# Altium PCB PCB1.PcbDoc
Units mil, origin at the board's own origin, x right, y up, seen from the top; angles counter-clockwise.
Board outline 4500 x 2600 mil, 2 copper layers (Top Layer, Bottom Layer), stack 60.4 mil thick; 9 components, 8 nets, 82 pads, 0 vias.
Unrouted connection lines stored in the file: 6.
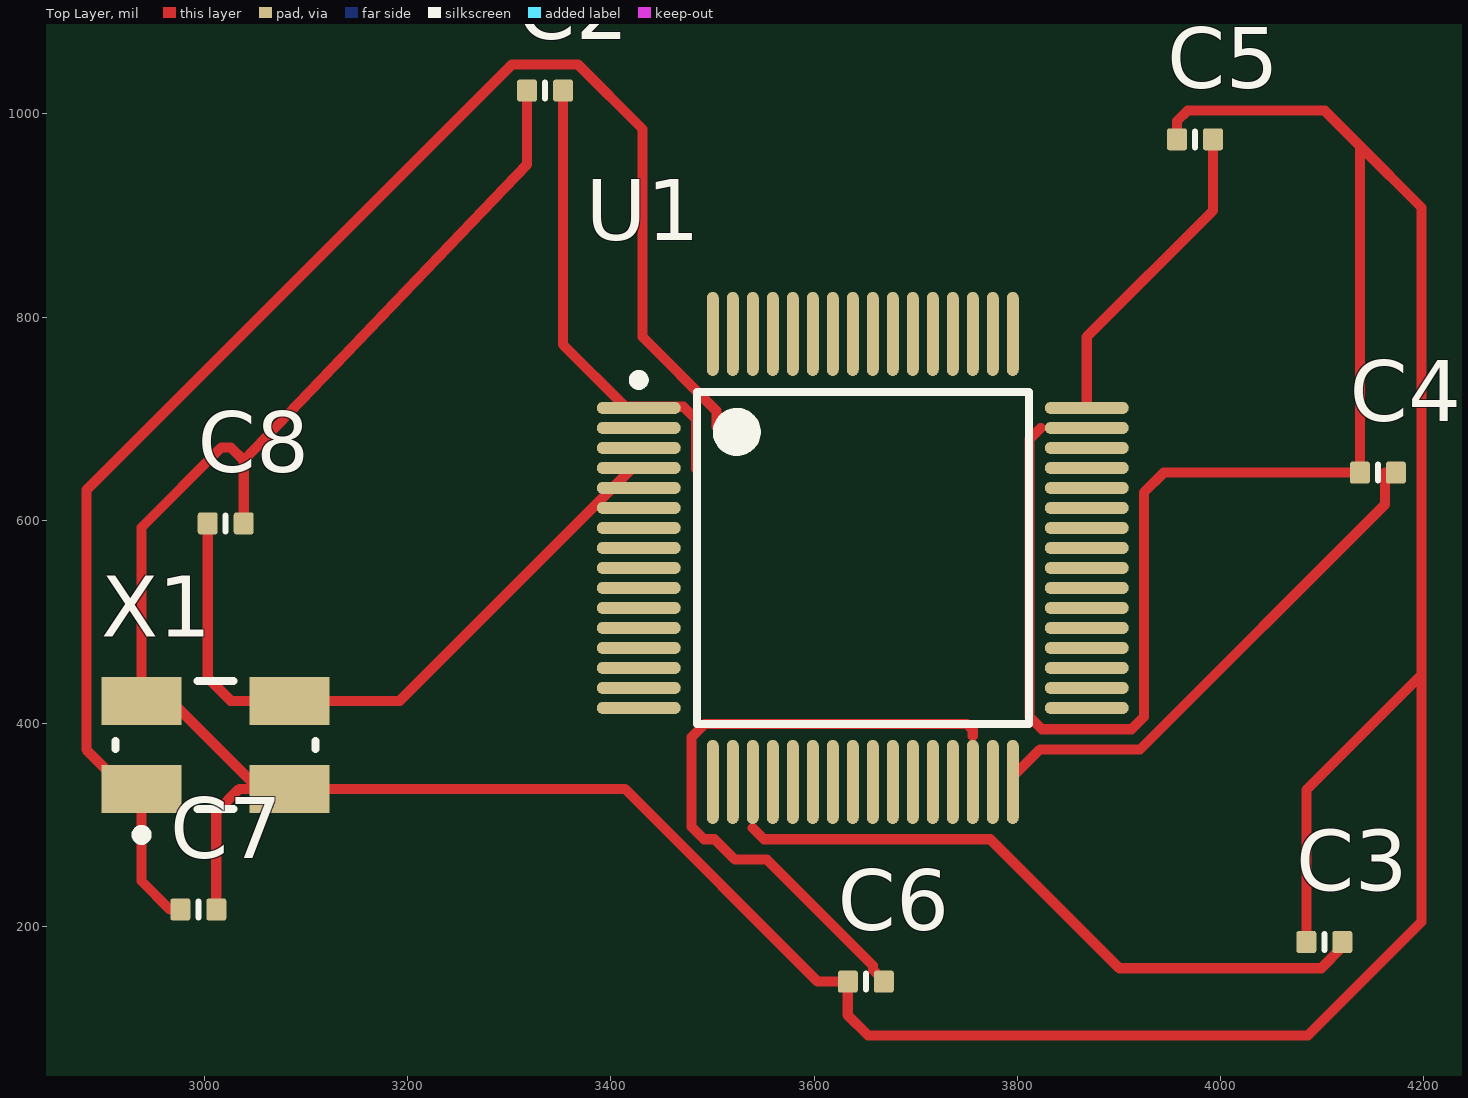
[diagram p0: Top Layer view]
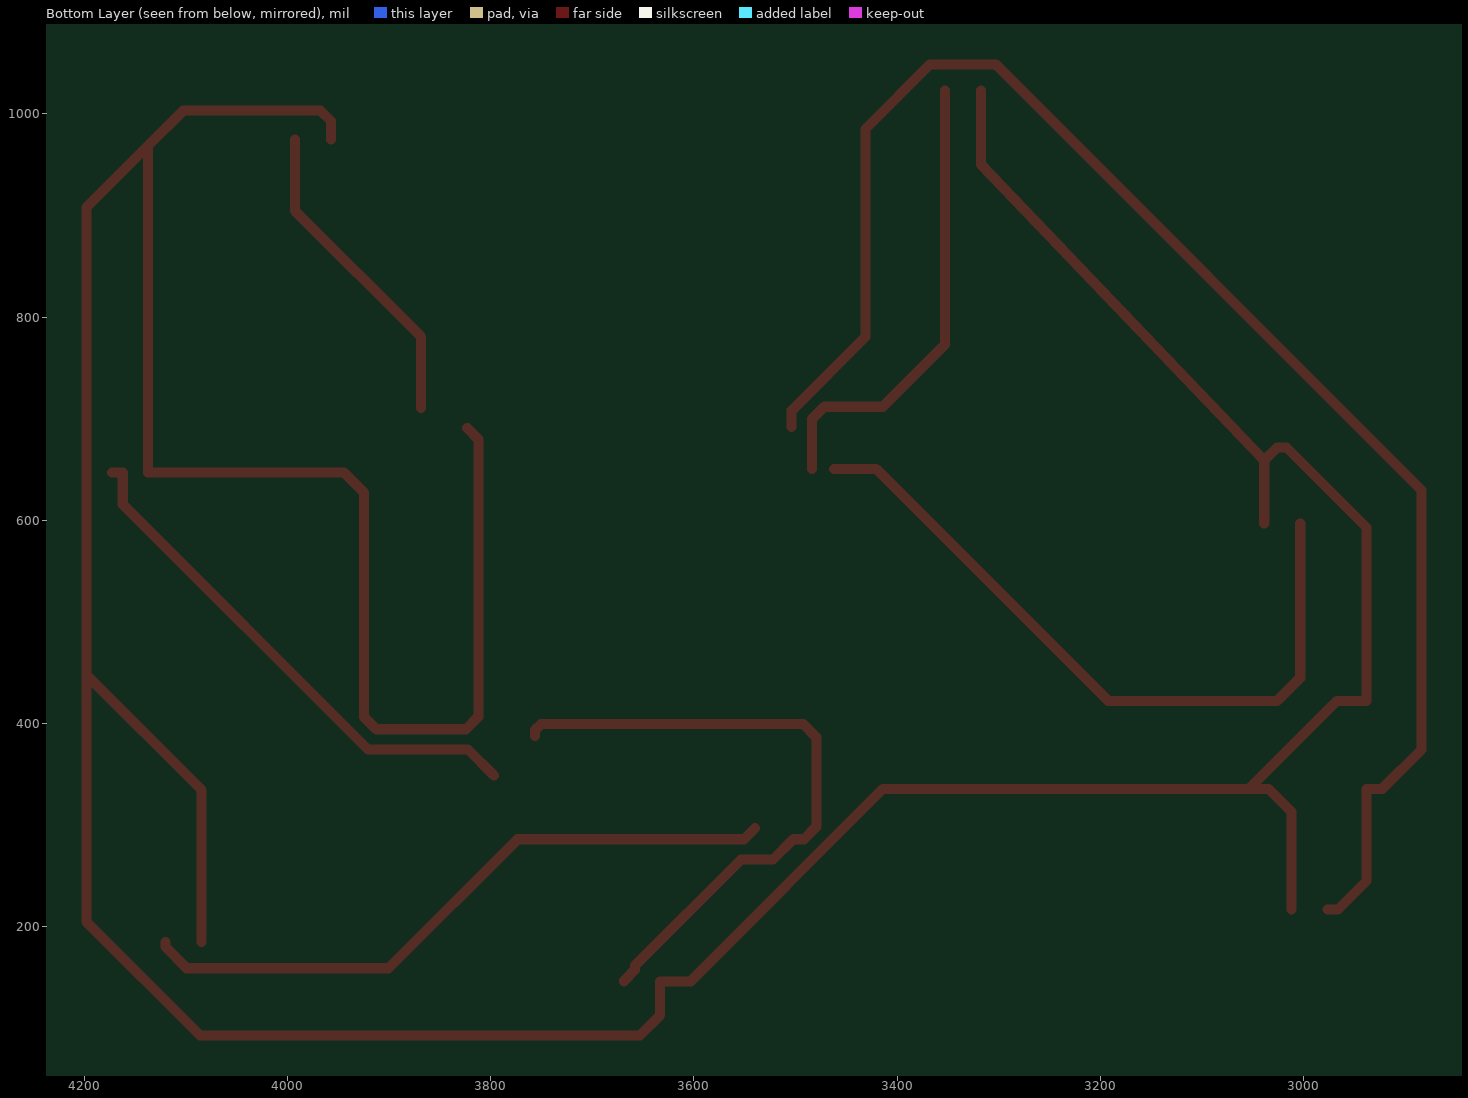
[diagram p1: Bottom Layer view, seen from below]
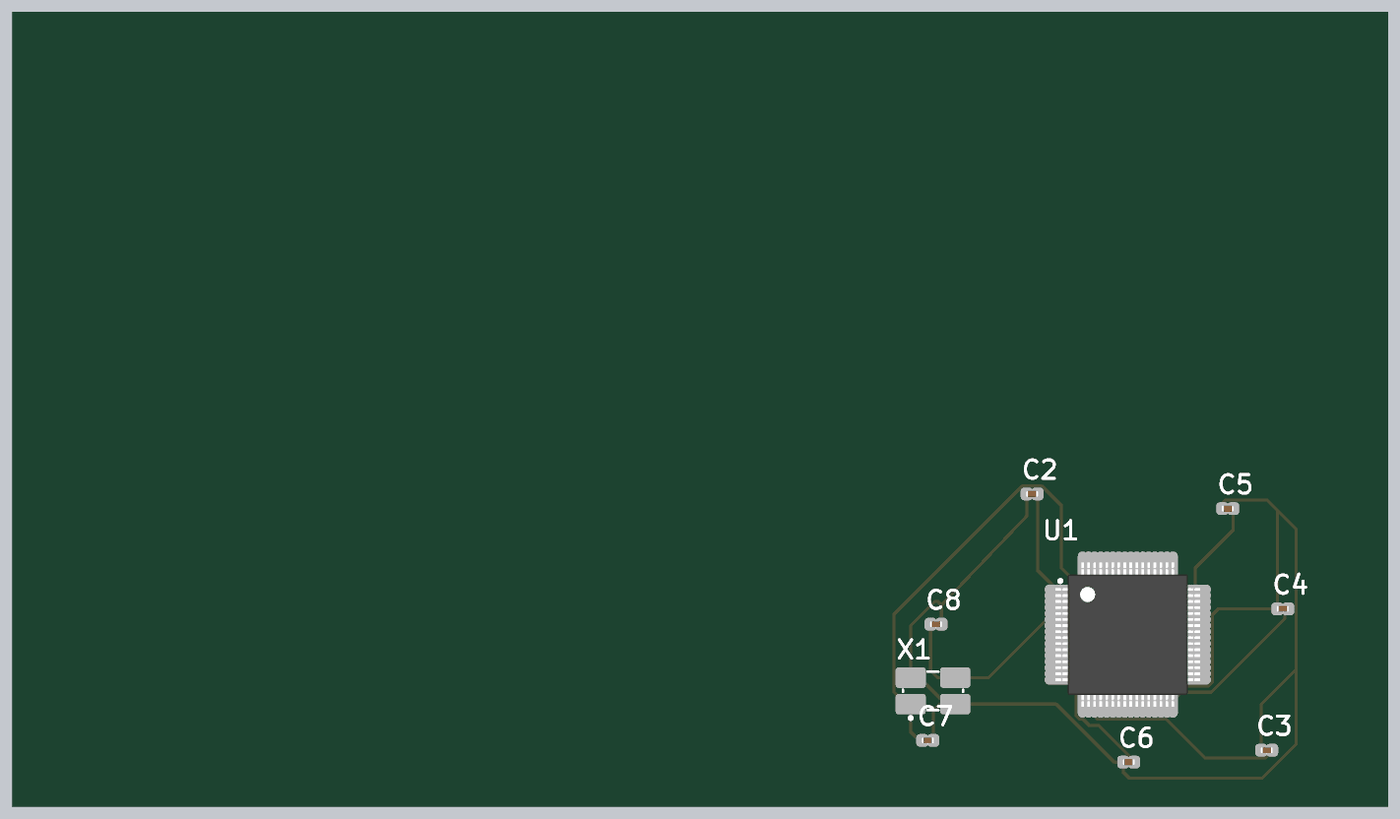
[diagram p2: 3D render of the assembled board from above, using the file's embedded part models]

## Layer stack, top to bottom
Top Solder: solder mask 0.5, Solder Resist, Dk 3.3
Top Layer: signal copper 0.7
Dielectric1: core 59, FR-4, Dk 4.3
Bottom Layer: signal copper 0.7
Bottom Solder: solder mask 0.5, Solder Resist, Dk 3.3

## Board outline
0,0 4500,0 4500,2600 0,2600

## Design rules (kind name [scope] priority, off if disabled: settings)
Clearance [All] p1 off: gap=10 ignorepadtopadclearanceinfootprint=TRUE
DiffPairsRouting [All] p1: maxlimit=10 minlimit=10 mostfreqgap=10 toplayer_minwidth=10 toplayer_maxwidth=10 toplayer_prefwidth=10 bottomlayer_minwidth=10 bottomlayer_maxwidth=10 bottomlayer_prefwidth=10 maxuncoupledlength=500
HoleSize [All] p1: absolutevalues=TRUE maxlimit=300 minlimit=10 maxpercent=80.000 minpercent=20.000
MinimumAnnularRing [All] p1: minimumring=10
PasteMaskExpansion [All] p1: expansion=10
PlaneClearance [All] p1: clearance=15
PlaneConnect [All] p1: pad.planeconnectstyle=Relief pad.reliefexpansion=20 pad.reliefentries=4 pad.reliefconductorwidth=10 pad.reliefairgap=10 via.planeconnectstyle=Direct via.reliefexpansion=20 via.reliefentries=4 via.reliefconductorwidth=10 via.reliefairgap=10
PolygonConnect [All] p1: thpad.connectstyle=Relief thpad.reliefconductorwidth=10 thpad.reliefentries=4 thpad.polygonreliefangle="90 Angle" thpad.airgapwidth=10 smdpad.connectstyle=Relief smdpad.reliefconductorwidth=10 smdpad.reliefentries=4 smdpad.polygonreliefangle="90 Angle" smdpad.airgapwidth=10 via.connectstyle=Direct via.reliefconductorwidth=10 via.reliefentries=4 via.polygonreliefangle="90 Angle" via.airgapwidth=10
RoomDefinition Sheet1 [InComponentClass('Sheet1')] p1: confinementstyle=ConfineIn formatcopy=TRUE lockcomponents=FALSE outline 1681,36 4473,36 4473,1238 1681,1238
RoutingVias [All] p1: holewidth=10 width=20 viastyle="Through Hole" minholewidth=10 minwidth=20 maxholewidth=10 maxwidth=20
SMDNeckDown [All] p1: percent=100.000
SilkToSolderMaskClearance SilkscreenOverComponentPads [IsPad] p1: minsilkscreentomaskgap=10 clearancetoexposedcopper=TRUE
SolderMaskExpansion [All] p1: expansion=10 istentingtop=FALSE
SupplyNets "Schematic Supply Nets" [InNet('GND')] p1: voltage=0.000
Width [All] p1: maxlimit=10 minlimit=10 preferedwidth=10
24 further rules are at their usual default settings.

## Components (designator, comment, footprint, x,y, rotation, side; value= is the part's Value field where it differs from the comment)
C2 "Capacitor 100nF +/-20% 50V 0402" CAPC0402(1005)60_L 3335.28,1023 r0 top value=100nF
C3 "Capacitor 100nF +/-20% 50V 0402" CAPC0402(1005)60_L 4102.28,185 r0 top value=100nF
C4 "Capacitor 100nF +/-20% 50V 0402" CAPC0402(1005)60_L 4155,647 r0 top
C5 "Capacitor 100nF +/-20% 50V 0402" CAPC0402(1005)60_L 3975,975 r0 top value=100nF
C6 "Capacitor 100nF +/-20% 50V 0402" CAPC0402(1005)60_L 3651,146 r0 top value=100nF
C7 "Capacitor 100nF +/-20% 50V 0402" CAPC0402(1005)60_L 2994,217 r0 top value=20pF
C8 "Capacitor 100nF +/-20% 50V 0402" CAPC0402(1005)60_L 3021,597 r0 top value=20pF
U1 "STM32F401RBT6" STM-LQFP64_M 3648,563 r0 top
X1 "7B-8.000MAAJ-T" TXC-7B-4_V 3011,379 r0 top

## Footprints (in the part's own frame and the unit in brackets; to place one, negate y for a bottom-side part, rotate by r counter-clockwise, add the part's x,y. Pads: shape width x height; smd on the part's side, far side on the other; paste and mask are expansions set on the pad)
CAPC0402(1005)60_L [mm] "Chip Capacitor, Body 1.0x0.5mm, Height 0.6mm, IPC High Density"
  rrect25% 0.5x0.55 smd: 1(-0.45,0) 2(0.45,0)
  silkscreen extent 0,-0.2 0,0.2, body extent -0.5,-0.25 0.5,0.25, height 0.6
STM-LQFP64_M [mm] "Thin QFP, 64-Leads, Body 10x10mm, Pitch 0.5mm, IPC Low Density"
  oval 2.1x0.3 smd: 1(-5.6,3.75) 2(-5.6,3.25) 3(-5.6,2.75) 4(-5.6,2.25) 5(-5.6,1.75) 6(-5.6,1.25) 7(-5.6,0.75) 8(-5.6,0.25) 9(-5.6,-0.25) 10(-5.6,-0.75) 11(-5.6,-1.25) 12(-5.6,-1.75) 13(-5.6,-2.25) 14(-5.6,-2.75) 15(-5.6,-3.25) 16(-5.6,-3.75) 33(5.6,-3.75) 34(5.6,-3.25) 35(5.6,-2.75) 36(5.6,-2.25) 37(5.6,-1.75) 38(5.6,-1.25) 39(5.6,-0.75) 40(5.6,-0.25) 41(5.6,0.25) 42(5.6,0.75) 43(5.6,1.25) 44(5.6,1.75) 45(5.6,2.25) 46(5.6,2.75) 47(5.6,3.25) 48(5.6,3.75)
  oval 0.3x2.1 smd: 17(-3.75,-5.6) 18(-3.25,-5.6) 19(-2.75,-5.6) 20(-2.25,-5.6) 21(-1.75,-5.6) 22(-1.25,-5.6) 23(-0.75,-5.6) 24(-0.25,-5.6) 25(0.25,-5.6) 26(0.75,-5.6) 27(1.25,-5.6) 28(1.75,-5.6) 29(2.25,-5.6) 30(2.75,-5.6) 31(3.25,-5.6) 32(3.75,-5.6) 49(3.75,5.6) 50(3.25,5.6) 51(2.75,5.6) 52(2.25,5.6) 53(1.75,5.6) 54(1.25,5.6) 55(0.75,5.6) 56(0.25,5.6) 57(-0.25,5.6) 58(-0.75,5.6) 59(-1.25,5.6) 60(-1.75,5.6) 61(-2.25,5.6) 62(-2.75,5.6) 63(-3.25,5.6) 64(-3.75,5.6)
  silkscreen extent -5.72,-4.15 4.15,4.57, body extent -6,-6 6,6, height 1.6
TXC-7B-4_V [mm] "SMD, 4-Leads, Body 5x3.2mm, Pitch 3.7mm"
  rect 2x1.2 smd: 1(-1.85,-1.1) 2(1.85,-1.1) 3(1.85,1.1) 4(-1.85,1.1)
  silkscreen extent -2.5,-2.37 2.5,1.6, body extent -2.5,-1.6 2.5,1.6, height 1.05

## Part data
C2 C3 C4 C5 C6 C7 C8: library part CMP-001-00067-3, "Chip Capacitor, 100nF +/-20%, 50V, 0402, Thickness 0.6 mm", Case/Package=0402, Max Operating Temperature=85°C, Min Operating Temperature=-55°C, Tolerance=10%, Voltage Rating=50V, Mounting Technology=SMT, Pins=2
U1: library part CMP-020-00012-3, "ARM Cortex -M4 32b MCU+FPU, 256 KB Flash, 64 KB RAM, -40 to 85 degC, 64-Pin LQFP, RoHS, Tray", Case/Package=LQFP, Frequency=84MHz, Manufacturer=STMicroelectronics, Max Supply Voltage=3.6V, Min Supply Voltage=1.8V, Package Description="64-Pin Low-profile Quad Flat Package, Body 10 x 10 mm, Pitch 0.5 mm", Package Quantity=160, Package Reference=LQFP64, Power=313mW, Datasheet URL=http://www.st.com/st-web-ui/static/active/en/resource/technical/document/datasheet/DM00086815.pdf, Datasheet Version="Rev. 5, 08/2015", Density=128KB, I/Os=50, Interface=USART, Manufacturer URL=http://www.st.com/, Mounting Technology=SM, Packaging=Tray, Pins=64, RAM Size=64KB, RoHS Compliant=True
X1: library part CMP-003-00013-2, "SMD Seam Sealing Crystal, 8 MHz, +/- 30 ppm, 18 pF, -10 to 70 degC, 4-Pin SMD, RoHS, Tape and Reel", Case/Package=7B-4, Frequency=8MHz, Frequency Tolerance=30ppm, Load Capacitance=18pF, Manufacturer=TXC, Max Operating Temperature=70°C, Min Operating Temperature=-20°C, Package Description="4-Pin Surface Mount Device, Body 5 x 3.2 mm, Pitch 3.7 mm", Package Quantity=1000, Resistance=100Ohm, Datasheet URL=http://www.txccorp.com/download/products/quartz_crystals/2015TXC_7B_19.pdf, Datasheet Version=Jul-15, ESR=100, Mounting Technology=SM, Package Reference=7B-4, Packaging=TapeandReel, Pins=4, RoHS Compliant=True, Tolerance=30ppm

## Nets (pads, with @x,y where several pads share a name; then routed paths per layer and width w, separated by ;. In a path a pad name is that pad's centre, name@x,y a point inside that pad or via, vN(x,y) a via of type N, cw(c..) or ccw(c..) an arc to the next point about the centre after c; other vN are vias at no path point)
GND: C2.1 C3.1 C4.1 C5.1 C6.1 C7.2 C8.2 U1.12 U1.18 U1.31 U1.47 U1.60 U1.63 X1.2 X1.4 | length 4946.7
  Top Layer w10: C7.2 3011.72,313 3034.41,335.69 X1.2@3053.62,335.69 ; C8.2 3038.72,659 ; C2.1 3317.57,950.57 3038.72,659 ; 3823.16,690.95 3812.13,679.93 3812.13,406.7 3824.38,394.46 3912.56,394.46 3924.81,406.7 3924.81,627.55 3944.26,647 C4.1 4137.28,968.72 ; C5.1 3957.28,993 3967.57,1003.28 4102.72,1003.28 4137.28,968.72 ; C3.1 4084.57,334.57 4198,448 ; 3038.72,659 3026,671.72 3016.72,671.72 2938,593 2938,422.31 X1.4 2967,422.31 X1.2@3053.62,335.69 ; X1.2@3053.62,335.69 X1.2 3413.92,335.69 3603.61,146 C6.1 3633.28,113 3653.28,93 4086,93 4198,205 4198,448 ; 4137.28,968.72 4198,908 4198,448
NetC2_2: C2.2 U1.1 | length 460.2
  Top Layer w10: C2.2 3353,773 3414.14,711.86 3471.62,711.86 3483.87,699.61 3483.87,650.68
NetC3_2: C3.2 U1.19 | length 651.1
  Top Layer w10: 3539.73,297.22 3550.76,286.19 3773.53,286.19 3900.54,159.17 4099.18,159.17 4120,179.99 C3.2
NetC4_2: C4.2 U1.32 | length 517.6
  Top Layer w10: U1.32@3796.86,349 3822.31,374.46 3920.85,374.46 4162.13,615.73 4162.13,647 C4.2
NetC5_2: C5.2 U1.48 | length 315.8
  Top Layer w10: U1.48 3868.47,780.62 3992.72,904.87 C5.2
NetC6_2: C6.2 U1.30 | length 634.1
  Top Layer w10: C6.2 3668.72,146.98 3658.13,157.58 3658.13,161.6 3553.54,266.19 3522.09,266.19 3502.09,286.19 3491.7,286.19 3479.46,298.44 3479.46,386.62 3492.45,399.61 3750.41,399.61 3756.27,393.76 3756.27,387.84
NetC7_1: C7.1 U1.5 X1.1 | length 1537.2
  Top Layer w10: X1.1 X1.1@2938,335.69 ; C7.1 2966,217 2938,245 X1.1@2938,335.69 ; 3503.87,691.79 3503.87,707.9 3431.17,780.59 3431.17,985.27 3367.61,1048.83 3302.95,1048.83 2883.8,629.67 2883.8,374.31 2922.42,335.69 X1.1@2938,335.69
NetC8_1: C8.1 U1.6 X1.3 | length 714.7
  Top Layer w10: C8.1 3003.28,445.02 3026,422.31 X1.3 3192.31,422.31 3420.68,650.68 3462,650.68
pads on no net: U1.2 U1.3 U1.4 U1.7 U1.8 U1.9 U1.10 U1.11 U1.13 U1.14 U1.15 U1.16 U1.17 U1.20 U1.21 U1.22 U1.23 U1.24 U1.25 U1.26 U1.27 U1.28 U1.29 U1.33 U1.34 U1.35 U1.36 U1.37 U1.38 U1.39 U1.40 U1.41 U1.42 U1.43 U1.44 U1.45 U1.46 U1.49 U1.50 U1.51 U1.52 U1.53 U1.54 U1.55 U1.56 U1.57 U1.58 U1.59 U1.61 U1.62 U1.64